# Altium PCB FPGA_Rack_v1_0.PcbDoc (part 4 of 5)
Units mil, origin at the board's own origin, x right, y up, seen from the top; angles counter-clockwise.
Board outline 6299.21 x 3937.01 mil, 8 copper layers (Top Layer, Top, Internal Plane 2, Vcc 3.3V, Internal Plane 1, Gnd, Mid-Layer 1, SIG1, Mid-Layer 2, SIG3, Mid-Layer 3, SIG2, Mid-Layer 4, SIG4, Bottom Layer, Bottom), stack 74.2 mil thick; 215 components, 379 nets, 1713 pads, 1076 vias.
Unrouted connection lines stored in the file: 1.
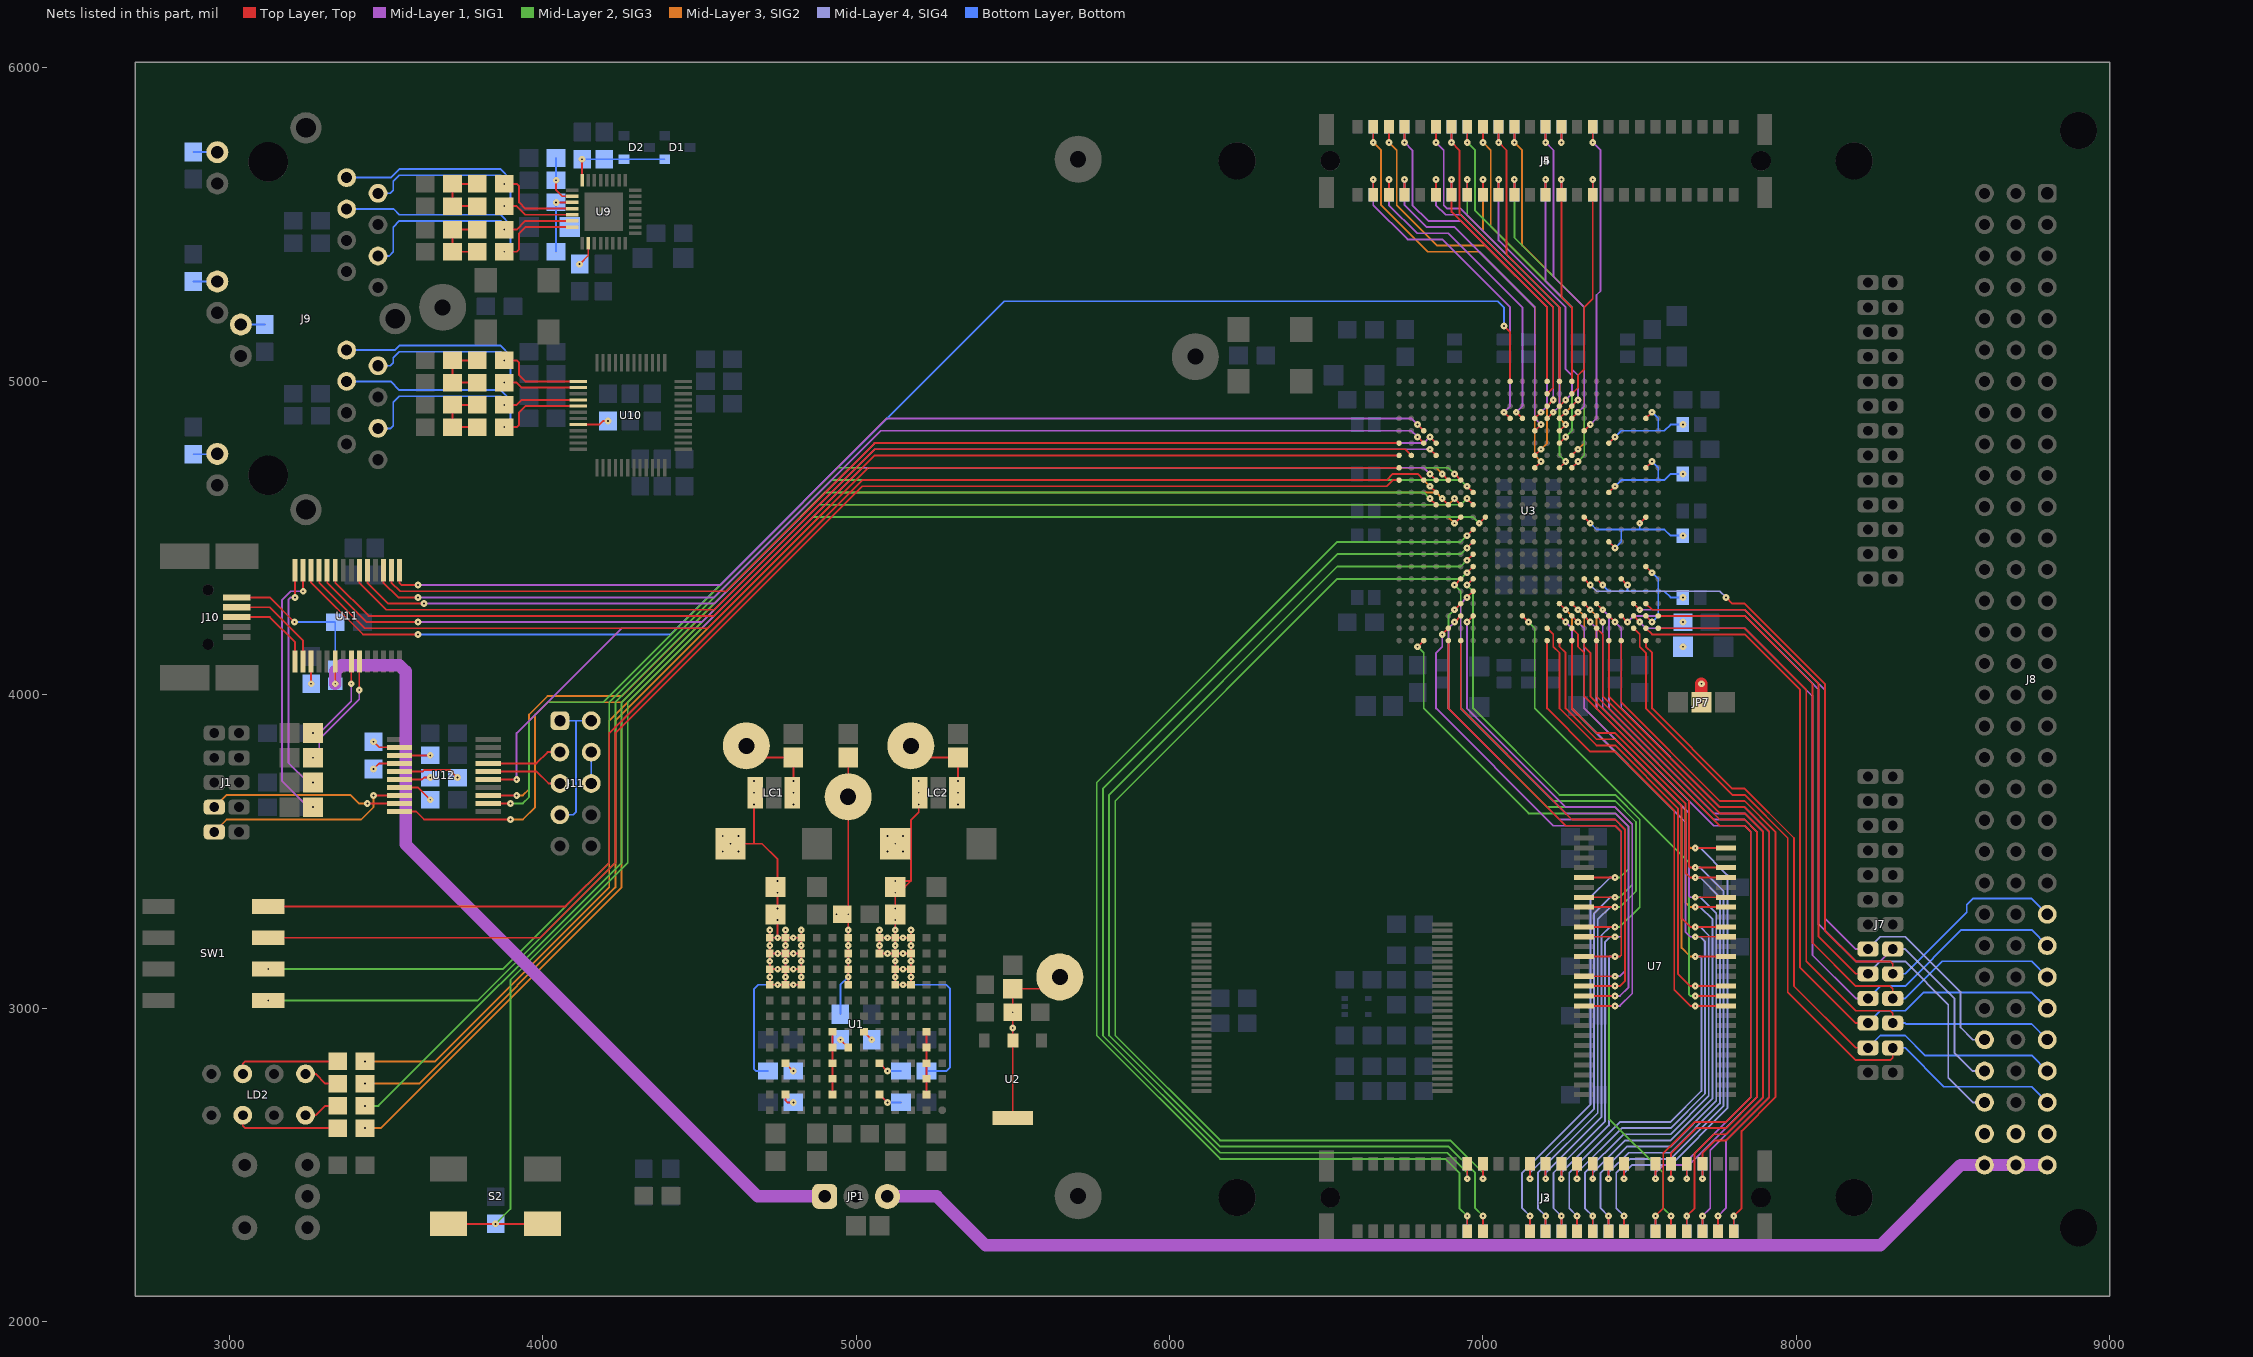
[diagram p10: the nets of this part, all layers, seen from the top]

## Via types
v1: diameter 21.65, hole 5.91, Top Layer, Top to Bottom Layer, Bottom, 1076 vias

## Nets (pads, with @x,y where several pads share a name; then routed paths per layer and width w, separated by ;. In a path a pad name is that pad's centre, name@x,y a point inside that pad or via, vN(x,y) a via of type N, cw(c..) or ccw(c..) an arc to the next point about the centre after c; other vN are vias at no path point) (continued)
MEZ_D02: J2.a12 J3.a12 U3.A20 U7.5 | length 2650.6
  Top Layer, Top w5.91: v1(6791.34,4153.54) U3.A20@6811.02,4173.23 ; J2.a12@7150,2288.23 v1(7150,2337.5) ; U7.5@7322.83,3417.32 v1(7421.26,3417.32)
  Mid-Layer 2, SIG3 w5.91: v1(6791.34,4153.54) 6811.02,4133.86 6811.02,3956.69 7145.67,3622.05 7421.26,3622.05 7464.57,3578.74 7464.57,3444.88 7437.01,3417.32 v1(7421.26,3417.32)
  Mid-Layer 4, SIG4 w5.91: v1(7150,2337.5) 7125,2362.5 7125,2475 7342.52,2692.52 7342.52,3354.33 7405.51,3417.32 v1(7421.26,3417.32)
  Bottom Layer, Bottom w5.91: J3.a12@7150,2288.23 v1(7150,2337.5)
MEZ_D03: J2.b12 J3.b12 U3.D17 U7.7 | length 2570.3
  Top Layer, Top w5.91: v1(6909.45,4271.65) U3.D17@6929.13,4291.34 ; v1(7150,2456.25) J2.b12@7150,2504.77 ; U7.7@7322.83,3354.33 v1(7421.26,3354.33)
  Mid-Layer 2, SIG3 w5.91: v1(6909.45,4271.65) 6889.76,4251.97 6889.76,3956.69 7204.72,3641.73 7421.26,3641.73 7476.38,3586.61 7476.38,3393.7 7437.01,3354.33 v1(7421.26,3354.33)
  Mid-Layer 4, SIG4 w5.91: v1(7150,2456.25) 7150,2475 7354.33,2679.33 7354.33,3303.15 7405.51,3354.33 v1(7421.26,3354.33)
  Bottom Layer, Bottom w5.91: v1(7150,2456.25) J3.b12@7150,2504.77
MEZ_D04: J2.a13 J3.a13 U3.F17 U7.8 | length 2751.3
  Top Layer, Top w5.91: v1(6909.45,4350.39) U3.F17@6929.13,4370.08 ; J2.a13@7200,2288.23 v1(7200,2337.5) ; U7.8@7322.83,3322.83 v1(7421.26,3322.83)
  Mid-Layer 2, SIG3 w5.91: v1(6909.45,4350.39) 6929.13,4330.71 6929.13,3956.69 7224.41,3661.42 7421.26,3661.42 7488.19,3594.49 7488.19,3374.02 7437.01,3322.83 v1(7421.26,3322.83)
  Mid-Layer 4, SIG4 w5.91: v1(7200,2337.5) 7175,2362.5 7175,2475 7366.14,2666.14 7366.14,3283.46 7405.51,3322.83 v1(7421.26,3322.83)
  Bottom Layer, Bottom w5.91: J3.a13@7200,2288.23 v1(7200,2337.5)
MEZ_D05: J2.b13 J3.b13 U3.F16 U7.10 | length 2592.2
  Top Layer, Top w5.91: v1(6948.82,4350.39) U3.F16@6968.5,4370.08 ; v1(7200,2456.25) J2.b13@7200,2504.77 ; U7.10@7322.83,3259.84 v1(7421.26,3259.84)
  Mid-Layer 2, SIG3 w5.91: v1(6948.82,4350.39) 6968.5,4330.71 6968.5,3956.69 7244.09,3681.1 7421.26,3681.1 7500,3602.36 7500,3322.83 7437.01,3259.84 v1(7421.26,3259.84)
  Mid-Layer 4, SIG4 w5.91: v1(7200,2456.25) 7200,2475 7377.95,2652.95 7377.95,3232.28 7405.51,3259.84 v1(7421.26,3259.84)
  Bottom Layer, Bottom w5.91: v1(7200,2456.25) J3.b13@7200,2504.77
MEZ_D06: J2.a14 J3.a14 U3.B18 U7.11 | length 2566.5
  Top Layer, Top w5.91: v1(6870.08,4192.91) U3.B18@6889.76,4212.6 ; J2.a14@7250,2288.23 v1(7250,2337.5) ; U7.11@7322.83,3228.35 v1(7421.26,3228.35)
  Mid-Layer 1, SIG1 w5.91: v1(6870.08,4192.91) 6870.08,4153.54 6850.39,4133.86 6850.39,3956.69 7224.41,3582.68 7421.26,3582.68 7440.94,3562.99 7440.94,3232.28 7437.01,3228.35 v1(7421.26,3228.35)
  Mid-Layer 4, SIG4 w5.91: v1(7250,2337.5) 7225,2362.5 7225,2475 7389.76,2639.76 7389.76,3212.6 7405.51,3228.35 v1(7421.26,3228.35)
  Bottom Layer, Bottom w5.91: J3.a14@7250,2288.23 v1(7250,2337.5)
MEZ_D07: J2.b14 J3.b14 U3.A18 U7.13 | length 2330.5
  Top Layer, Top w5.91: U3.A18@6889.76,4173.23 6889.76,3956.69 7263.78,3582.68 7421.26,3582.68 7440.94,3562.99 7440.94,3169.29 7437.01,3165.35 v1(7421.26,3165.35) U7.13@7322.83,3165.35 ; v1(7250,2456.25) J2.b14@7250,2504.77
  Mid-Layer 4, SIG4 w5.91: v1(7250,2456.25) 7250,2475 7401.57,2626.57 7401.57,3161.42 7405.51,3165.35 v1(7421.26,3165.35)
  Bottom Layer, Bottom w5.91: v1(7250,2456.25) J3.b14@7250,2504.77
MEZ_D08: J2.a15 J3.a15 U3.D9 U7.42 | length 2636
  Top Layer, Top w5.91: U3.D9@7244.09,4291.34 v1(7263.78,4271.65) ; J2.a15@7300,2288.23 v1(7300,2337.5) ; v1(7677.17,3165.35) U7.42@7775.59,3165.35
  Mid-Layer 3, SIG2 w5.91: v1(7263.78,4271.65) 7283.46,4251.97 7283.46,3956.69 7633.86,3606.3 7633.86,3192.91 7661.42,3165.35 v1(7677.17,3165.35)
  Mid-Layer 4, SIG4 w5.91: v1(7300,2337.5) 7275,2362.5 7275,2475 7437.8,2637.8 7598.43,2637.8 7696.85,2736.22 7696.85,3161.42 7692.91,3165.35 v1(7677.17,3165.35)
  Bottom Layer, Bottom w5.91: J3.a15@7300,2288.23 v1(7300,2337.5)
MEZ_D09: J2.b15 J3.b15 U3.C9 U7.44 | length 2462.3
  Top Layer, Top w5.91: U3.C9@7244.09,4251.97 v1(7263.78,4232.28) ; v1(7300,2456.25) J2.b15@7300,2504.77 ; v1(7677.17,3228.35) U7.44@7775.59,3228.35
  Mid-Layer 1, SIG1 w5.91: v1(7263.78,4232.28) 7283.46,4212.6 7283.46,3956.69 7645.67,3594.49 7645.67,3244.09 7661.42,3228.35 v1(7677.17,3228.35)
  Mid-Layer 4, SIG4 w5.91: v1(7300,2456.25) 7300,2475 7443.11,2618.11 7598.43,2618.11 7708.66,2728.35 7708.66,3212.6 7692.91,3228.35 v1(7677.17,3228.35)
  Bottom Layer, Bottom w5.91: v1(7300,2456.25) J3.b15@7300,2504.77
MEZ_D10: J2.a16 J3.a16 U3.A9 U7.45 | length 2545.1
  Top Layer, Top w5.91: U3.A9@7244.09,4173.23 7244.09,4153.54 7263.78,4133.86 7263.78,3956.69 7362.2,3858.27 7421.26,3858.27 7633.86,3645.67 7633.86,3287.4 7661.42,3259.84 v1(7677.17,3259.84) U7.45@7775.59,3259.84 ; J2.a16@7350,2288.23 v1(7350,2337.5)
  Mid-Layer 4, SIG4 w5.91: v1(7350,2337.5) 7325,2362.5 7325,2475 7448.43,2598.43 7598.43,2598.43 7720.47,2720.47 7720.47,3232.28 7692.91,3259.84 v1(7677.17,3259.84)
  Bottom Layer, Bottom w5.91: J3.a16@7350,2288.23 v1(7350,2337.5)
MEZ_D11: J2.b16 J3.b16 U3.D8 U7.47 | length 2478
  Top Layer, Top w5.91: U3.D8@7283.46,4291.34 v1(7303.15,4271.65) ; v1(7350,2456.25) J2.b16@7350,2504.77 ; v1(7677.17,3322.83) U7.47@7775.59,3322.83
  Mid-Layer 3, SIG2 w5.91: v1(7303.15,4271.65) 7322.83,4251.97 7322.83,3956.69 7645.67,3633.86 7645.67,3338.58 7661.42,3322.83 v1(7677.17,3322.83)
  Mid-Layer 4, SIG4 w5.91: v1(7350,2456.25) 7350,2475 7453.74,2578.74 7598.43,2578.74 7732.28,2712.6 7732.28,3283.46 7692.91,3322.83 v1(7677.17,3322.83)
  Bottom Layer, Bottom w5.91: v1(7350,2456.25) J3.b16@7350,2504.77
MEZ_D12: J2.a17 J3.a17 U3.C8 U7.48 | length 2565.6
  Top Layer, Top w5.91: U3.C8@7283.46,4251.97 v1(7303.15,4232.28) ; J2.a17@7400,2288.23 v1(7400,2337.5) ; v1(7677.17,3354.33) U7.48@7775.59,3354.33
  Mid-Layer 1, SIG1 w5.91: v1(7303.15,4232.28) 7322.83,4212.6 7322.83,3956.69 7657.48,3622.05 7657.48,3358.27 7661.42,3354.33 v1(7677.17,3354.33)
  Mid-Layer 4, SIG4 w5.91: v1(7400,2337.5) 7375,2362.5 7375,2475 7459.06,2559.06 7598.43,2559.06 7744.09,2704.72 7744.09,3303.15 7692.91,3354.33 v1(7677.17,3354.33)
  Bottom Layer, Bottom w5.91: J3.a17@7400,2288.23 v1(7400,2337.5)
MEZ_D13: J2.b17 J3.b17 U3.A8 U7.50 | length 2387.1
  Top Layer, Top w5.91: U3.A8@7283.46,4173.23 7283.46,3956.69 7362.2,3877.95 7421.26,3877.95 7645.67,3653.54 7645.67,3433.07 7661.42,3417.32 v1(7677.17,3417.32) U7.50@7775.59,3417.32 ; v1(7400,2456.25) J2.b17@7400,2504.77
  Mid-Layer 4, SIG4 w5.91: v1(7400,2456.25) 7400,2475 7464.37,2539.37 7598.43,2539.37 7755.91,2696.85 7755.91,3354.33 7692.91,3417.32 v1(7677.17,3417.32)
  Bottom Layer, Bottom w5.91: v1(7400,2456.25) J3.b17@7400,2504.77
MEZ_D14: J2.a18 J3.a18 U3.B8 U7.51 | length 2518.8
  Top Layer, Top w5.91: U3.B8@7283.46,4212.6 7303.15,4192.91 7303.15,4153.54 7322.83,4133.86 7322.83,3996.06 7657.48,3661.42 7657.48,3452.76 7661.42,3448.82 v1(7677.17,3448.82) U7.51@7775.59,3448.82 ; J2.a18@7450,2288.23 v1(7450,2337.5)
  Mid-Layer 4, SIG4 w5.91: v1(7450,2337.5) 7425,2362.5 7425,2475 7469.69,2519.68 7598.43,2519.68 7767.72,2688.98 7767.72,3374.02 7692.91,3448.82 v1(7677.17,3448.82)
  Bottom Layer, Bottom w5.91: J3.a18@7450,2288.23 v1(7450,2337.5)
MEZ_D15: J2.b18 J3.b18 U3.D7 U7.53 | length 2447
  Top Layer, Top w5.91: U3.D7@7322.83,4291.34 v1(7342.52,4271.65) ; v1(7450,2456.25) J2.b18@7450,2504.77 ; v1(7677.17,3511.81) U7.53@7775.59,3511.81
  Mid-Layer 3, SIG2 w5.91: v1(7342.52,4271.65) 7362.2,4251.97 7362.2,3956.69 7657.48,3661.42 7657.48,3515.75 7661.42,3511.81 v1(7677.17,3511.81)
  Mid-Layer 4, SIG4 w5.91: v1(7450,2456.25) 7450,2475 7475,2500 7598.43,2500 7779.53,2681.1 7779.53,3425.2 7692.91,3511.81 v1(7677.17,3511.81)
  Bottom Layer, Bottom w5.91: v1(7450,2456.25) J3.b18@7450,2504.77
MEZ_NCS3: J2.a8 J3.a8 U3.K16 | length 3927.4
  Top Layer, Top w5.91: v1(6948.82,4507.87) U3.K16@6968.5,4527.56 ; J2.a8@6950,2288.23 v1(6950,2337.5)
  Mid-Layer 2, SIG3 w5.91: v1(6948.82,4507.87) 6929.13,4488.19 6535.43,4488.19 5767.72,3720.47 5767.72,2913.39 6161.42,2519.68 6880.31,2519.68 6925,2475 6925,2362.5 v1(6950,2337.5)
  Bottom Layer, Bottom w5.91: J3.a8@6950,2288.23 v1(6950,2337.5)
MEZ_NCS4: J2.b8 J3.b8 U3.J16 | length 3754.6
  Top Layer, Top w5.91: v1(6948.82,4468.5) U3.J16@6968.5,4488.19 ; v1(6950,2456.25) J2.b8@6950,2504.77
  Mid-Layer 2, SIG3 w5.91: v1(6948.82,4468.5) 6929.13,4448.82 6535.43,4448.82 5787.4,3700.79 5787.4,2913.39 6161.42,2539.37 6885.63,2539.37 6950,2475 v1(6950,2456.25)
  Bottom Layer, Bottom w5.91: v1(6950,2456.25) J3.b8@6950,2504.77
MEZ_NCS5: J2.a9 J3.a9 U3.H16 | length 3843
  Top Layer, Top w5.91: v1(6948.82,4429.13) U3.H16@6968.5,4448.82 ; J2.a9@7000,2288.23 v1(7000,2337.5)
  Mid-Layer 2, SIG3 w5.91: v1(6948.82,4429.13) 6929.13,4409.45 6535.43,4409.45 5807.09,3681.1 5807.09,2913.39 6161.42,2559.06 6890.94,2559.06 6975,2475 6975,2362.5 v1(7000,2337.5)
  Bottom Layer, Bottom w5.91: J3.a9@7000,2288.23 v1(7000,2337.5)
MEZ_NCS6: J2.b9 J3.b9 U3.G16 | length 3670.2
  Top Layer, Top w5.91: v1(6948.82,4389.76) U3.G16@6968.5,4409.45 ; v1(7000,2456.25) J2.b9@7000,2504.77
  Mid-Layer 2, SIG3 w5.91: v1(6948.82,4389.76) 6929.13,4370.08 6535.43,4370.08 5826.77,3661.42 5826.77,2913.39 6161.42,2578.74 6896.26,2578.74 7000,2475 v1(7000,2456.25)
  Bottom Layer, Bottom w5.91: v1(7000,2456.25) J3.b9@7000,2504.77
MEZ_NOE/NRD0: J2.b20 J3.b20 U3.C7 | length 2333.4
  Top Layer, Top w5.91: U3.C7@7322.83,4251.97 v1(7342.52,4232.28) ; v1(7550,2456.25) J2.b20@7550,2504.77
  Mid-Layer 1, SIG1 w5.91: v1(7342.52,4232.28) 7362.2,4212.6 7362.2,3956.69 7736.22,3582.68 7834.65,3582.68 7854.33,3562.99 7854.33,2716.54 7637.8,2500 7575,2500 7550,2475 v1(7550,2456.25)
  Bottom Layer, Bottom w5.91: v1(7550,2456.25) J3.b20@7550,2504.77
MEZ_NRESET: J2.a25 J3.a25 U3.A4 | length 2239.4
  Top Layer, Top w5.91: U3.A4@7440.94,4173.23 7440.94,3976.38 7755.91,3661.42 7834.65,3661.42 7933.07,3562.99 7933.07,2716.54 7825,2608.46 7825,2362.5 v1(7800,2337.5) J2.a25@7800,2288.23
  Bottom Layer, Bottom w5.91: J3.a25@7800,2288.23 v1(7800,2337.5)
MEZ_NUB/NWR1: J2.b21 J3.b21 U3.A6 | length 2192.8
  Top Layer, Top w5.91: U3.A6@7362.2,4173.23 7362.2,3996.06 7755.91,3602.36 7834.65,3602.36 7874.02,3562.99 7874.02,2716.54 7775.59,2618.11 7680.61,2618.11 7600,2537.5 J2.b21@7600,2504.77 v1(7600,2456.25)
  Bottom Layer, Bottom w5.91: v1(7600,2456.25) J3.b21@7600,2504.77
MEZ_NWAIT: J2.a20 J3.a20 U3.A7 | length 2385.4
  Top Layer, Top w5.91: U3.A7@7322.83,4173.23 7322.83,4153.54 7342.52,4133.86 7342.52,3996.06 7755.91,3582.68 7834.65,3582.68 7854.33,3562.99 7854.33,2716.54 7775.59,2637.8 7675.3,2637.8 7575,2537.5 7575,2362.5 v1(7550,2337.5) J2.a20@7550,2288.23
  Bottom Layer, Bottom w5.91: J3.a20@7550,2288.23 v1(7550,2337.5)
MEZ_NWR/NWR0: J2.a21 J3.a21 U3.A17 U7.16 | length 2452.1
  Top Layer, Top w5.91: U3.A17@6929.13,4173.23 6929.13,3956.69 7283.46,3602.36 7421.26,3602.36 7452.76,3570.87 7452.76,3086.61 7437.01,3070.87 v1(7421.26,3070.87) U7.16@7322.83,3070.87 ; J2.a21@7600,2288.23 v1(7600,2337.5)
  Mid-Layer 2, SIG3 w5.91: v1(7421.26,3070.87) 7405.51,3070.87 7401.57,3066.93 7401.57,2648.43 7575,2475 7575,2362.5 v1(7600,2337.5)
  Bottom Layer, Bottom w5.91: J3.a21@7600,2288.23 v1(7600,2337.5)
MEZ_PA0_MISO: J4.a2 J5.a2 U3.W13 | length 1120.7
  Top Layer, Top w5.91: J4.a2@6650,5595.23 v1(6650,5643.75) ; v1(7066.93,4901.57) U3.W13@7086.61,4881.89
  Mid-Layer 1, SIG1 w5.91: v1(6650,5643.75) 6650,5562.5 6759.74,5452.76 6870.08,5452.76 7086.61,5236.22 7086.61,4921.26 v1(7066.93,4901.57)
  Bottom Layer, Bottom w5.91: J5.a2@6650,5595.23 v1(6650,5643.75)
MEZ_PA1_MOSI: J4.b2 J5.b2 U3.R11 | length 1462.5
  Top Layer, Top w5.91: v1(6650,5762.5) J4.b2@6650,5811.77 ; U3.R11@7165.35,4724.41 v1(7185.04,4744.09)
  Mid-Layer 3, SIG2 w5.91: v1(6650,5762.5) 6675,5737.5 6675,5562.5 6824.11,5413.39 6988.19,5413.39 7165.35,5236.22 7165.35,4763.78 v1(7185.04,4744.09)
  Bottom Layer, Bottom w5.91: v1(6650,5762.5) J5.b2@6650,5811.77
MEZ_PA2_SPCK: J4.a3 J5.a3 U3.W12 | length 1110.1
  Top Layer, Top w5.91: J4.a3@6700,5595.23 v1(6700,5643.75) ; v1(7106.3,4901.57) U3.W12@7125.98,4881.89
  Mid-Layer 1, SIG1 w5.91: v1(6700,5643.75) 6700,5562.5 6790.06,5472.44 6889.76,5472.44 7125.98,5236.22 7125.98,4921.26 v1(7106.3,4901.57)
  Bottom Layer, Bottom w5.91: J5.a3@6700,5595.23 v1(6700,5643.75)
MEZ_PA5_NPCS2: J4.b3 J5.b3 U3.T11 | length 1412.5
  Top Layer, Top w5.91: v1(6700,5762.5) J4.b3@6700,5811.77 ; U3.T11@7165.35,4763.78 v1(7185.04,4783.46)
  Mid-Layer 3, SIG2 w5.91: v1(6700,5762.5) 6725,5737.5 6725,5562.5 6854.43,5433.07 7007.87,5433.07 7204.72,5236.22 7204.72,4803.15 v1(7185.04,4783.46)
  Bottom Layer, Bottom w5.91: v1(6700,5762.5) J5.b3@6700,5811.77
MEZ_PA6_NPCS3: J4.a4 J5.a4 U3.V11 | length 1138.8
  Top Layer, Top w5.91: J4.a4@6750,5595.23 v1(6750,5643.75) ; U3.V11@7165.35,4842.52 v1(7185.04,4862.2)
  Mid-Layer 1, SIG1 w5.91: v1(6750,5643.75) 6750,5562.5 6820.37,5492.13 6909.45,5492.13 7165.35,5236.22 7165.35,4881.89 v1(7185.04,4862.2)
  Bottom Layer, Bottom w5.91: J5.a4@6750,5595.23 v1(6750,5643.75)
MEZ_PA09/IRQ0: J2.a22 J3.a22 U3.B6 | length 2364.1
  Top Layer, Top w5.91: U3.B6@7362.2,4212.6 7381.89,4192.91 7381.89,3996.06 7755.91,3622.05 7834.65,3622.05 7893.7,3562.99 7893.7,2716.54 7775.59,2598.43 7735.93,2598.43 7675,2537.5 7675,2362.5 v1(7650,2337.5) J2.a22@7650,2288.23
  Bottom Layer, Bottom w5.91: J3.a22@7650,2288.23 v1(7650,2337.5)
MEZ_PA10/IRQ1: J2.b22 J3.b22 U3.C6 | length 2255.2
  Top Layer, Top w5.91: U3.C6@7362.2,4251.97 v1(7381.89,4232.28) ; v1(7650,2456.25) J2.b22@7650,2504.77
  Mid-Layer 1, SIG1 w5.91: v1(7381.89,4232.28) 7381.89,3956.69 7736.22,3602.36 7834.65,3602.36 7874.02,3562.99 7874.02,2716.54 7650,2492.52 v1(7650,2456.25)
  Bottom Layer, Bottom w5.91: v1(7650,2456.25) J3.b22@7650,2504.77
MEZ_PA11/IRQ2: J2.a23 J3.a23 U3.D6 | length 2410.4
  Top Layer, Top w5.91: U3.D6@7362.2,4291.34 v1(7381.89,4271.65) ; J2.a23@7700,2288.23 v1(7700,2337.5)
  Mid-Layer 1, SIG1 w5.91: v1(7381.89,4271.65) 7401.57,4251.97 7401.57,3956.69 7736.22,3622.05 7834.65,3622.05 7893.7,3562.99 7893.7,2716.54 7725,2547.83 7725,2362.5 v1(7700,2337.5)
  Bottom Layer, Bottom w5.91: J3.a23@7700,2288.23 v1(7700,2337.5)
MEZ_PA12/IRQ3: J2.b23 J3.b23 U3.A5 | length 2132.1
  Top Layer, Top w5.91: U3.A5@7401.57,4173.23 7401.57,3996.06 7755.91,3641.73 7834.65,3641.73 7913.39,3562.99 7913.39,2716.54 7775.59,2578.74 7741.24,2578.74 7700,2537.5 J2.b23@7700,2504.77 v1(7700,2456.25)
  Bottom Layer, Bottom w5.91: v1(7700,2456.25) J3.b23@7700,2504.77
MEZ_PA13/FIQ: J2.a24 J3.a24 U3.C5 | length 2338.8
  Top Layer, Top w5.91: U3.C5@7401.57,4251.97 v1(7421.26,4232.28) ; J2.a24@7750,2288.23 v1(7750,2337.5)
  Mid-Layer 1, SIG1 w5.91: v1(7421.26,4232.28) 7440.94,4212.6 7440.94,3956.69 7755.91,3641.73 7834.65,3641.73 7913.39,3562.99 7913.39,2716.54 7775,2578.15 7775,2362.5 v1(7750,2337.5)
  Bottom Layer, Bottom w5.91: J3.a24@7750,2288.23 v1(7750,2337.5)
MEZ_PB1: J4.b13 J5.b13 U3.W8 | length 1046.3
  Top Layer, Top w5.91: v1(7200,5762.5) J4.b13@7200,5811.77 ; U3.W8@7283.46,4881.89 v1(7303.15,4901.57)
  Mid-Layer 1, SIG1 w5.91: v1(7200,5762.5) 7225,5737.5 7225,5334.06 7322.83,5236.22 7322.83,4921.26 v1(7303.15,4901.57)
  Bottom Layer, Bottom w5.91: v1(7200,5762.5) J5.b13@7200,5811.77
MEZ_PB2: J4.a14 J5.a14 U3.AB8 | length 706.1
  Top Layer, Top w5.91: v1(7250,5643.75) J4.a14@7250,5595.23 7250,5269.69 7283.46,5236.22 U3.AB8@7283.46,5000
  Bottom Layer, Bottom w5.91: J5.a14@7250,5595.23 v1(7250,5643.75)
MEZ_PB6: J4.a6 J5.a6 U3.Y10 | length 1011
  Top Layer, Top w5.91: J4.a6@6850,5595.23 v1(6850,5643.75) ; U3.Y10@7204.72,4921.26 v1(7224.41,4940.94)
  Mid-Layer 1, SIG1 w5.91: v1(6850,5643.75) 6850,5562.5 6881,5531.5 6929.13,5531.5 7224.41,5236.22 v1(7224.41,4940.94)
  Bottom Layer, Bottom w5.91: J5.a6@6850,5595.23 v1(6850,5643.75)
MEZ_PB7: J4.b6 J5.b6 U3.W10 | length 1183.8
  Top Layer, Top w5.91: v1(6850,5762.5) J4.b6@6850,5811.77 ; U3.W10@7204.72,4881.89 v1(7224.41,4901.57)
  Mid-Layer 1, SIG1 w5.91: v1(6850,5762.5) 6875,5737.5 6875,5562.5 6886.32,5551.18 6929.13,5551.18 7244.09,5236.22 7244.09,4921.26 v1(7224.41,4901.57)
  Bottom Layer, Bottom w5.91: v1(6850,5762.5) J5.b6@6850,5811.77
MEZ_PB8: J4.a7 J5.a7 U3.AB10 | length 818.5
  Top Layer, Top w5.91: v1(6900,5643.75) J4.a7@6900,5595.23 6900,5540.94 7204.72,5236.22 U3.AB10@7204.72,5000
  Bottom Layer, Bottom w5.91: J5.a7@6900,5595.23 v1(6900,5643.75)
MEZ_PB9: J4.b7 J5.b7 U3.AA10 | length 1042.9
  Top Layer, Top w5.91: J4.b7@6900,5811.77 v1(6900,5762.5) 6925,5737.5 6925,5535.63 7224.41,5236.22 7224.41,4980.31 U3.AA10@7204.72,4960.63
  Bottom Layer, Bottom w5.91: v1(6900,5762.5) J5.b7@6900,5811.77
MEZ_PB10: J4.b8 J5.b8 U3.U9 | length 1212.3
  Top Layer, Top w5.91: v1(6950,5762.5) J4.b8@6950,5811.77 ; U3.U9@7244.09,4803.15 v1(7263.78,4822.83)
  Mid-Layer 2, SIG3 w5.91: v1(6950,5762.5) 6975,5737.5 6975,5544.69 7283.46,5236.22 7283.46,4842.52 v1(7263.78,4822.83)
  Bottom Layer, Bottom w5.91: v1(6950,5762.5) J5.b8@6950,5811.77
MEZ_PB11: J4.a8 J5.a8 U3.R9 | length 1154.5
  Top Layer, Top w5.91: J4.a8@6950,5595.23 v1(6950,5643.75) ; U3.R9@7244.09,4724.41 v1(7263.78,4744.09)
  Mid-Layer 2, SIG3 w5.91: v1(6950,5643.75) 6950,5530.31 7244.09,5236.22 7244.09,4763.78 v1(7263.78,4744.09)
  Bottom Layer, Bottom w5.91: J5.a8@6950,5595.23 v1(6950,5643.75)
MEZ_PB14: J4.a9 J5.a9 U3.V9 | length 1015.7
  Top Layer, Top w5.91: J4.a9@7000,5595.23 v1(7000,5643.75) ; U3.V9@7244.09,4842.52 v1(7263.78,4862.2)
  Mid-Layer 3, SIG2 w5.91: v1(7000,5643.75) 7000,5480.31 7244.09,5236.22 7244.09,4881.89 v1(7263.78,4862.2)
  Bottom Layer, Bottom w5.91: J5.a9@7000,5595.23 v1(7000,5643.75)
MEZ_PB15: J4.b9 J5.b9 U3.W9 | length 1112.9
  Top Layer, Top w5.91: v1(7000,5762.5) J4.b9@7000,5811.77 ; U3.W9@7244.09,4881.89 v1(7263.78,4901.57)
  Mid-Layer 3, SIG2 w5.91: v1(7000,5762.5) 7025,5737.5 7025,5494.69 7283.46,5236.22 7283.46,4921.26 v1(7263.78,4901.57)
  Bottom Layer, Bottom w5.91: v1(7000,5762.5) J5.b9@7000,5811.77
MEZ_PB16: J4.a10 J5.a10 U3.Y9 | length 932.5
  Top Layer, Top w5.91: J4.a10@7050,5595.23 v1(7050,5643.75) ; U3.Y9@7244.09,4921.26 v1(7263.78,4940.94)
  Mid-Layer 1, SIG1 w5.91: v1(7050,5643.75) 7050,5450 7263.78,5236.22 7263.78,5039.37 7283.46,5019.69 7283.46,4960.63 v1(7263.78,4940.94)
  Bottom Layer, Bottom w5.91: J5.a10@7050,5595.23 v1(7050,5643.75)
MEZ_PB17: J4.b10 J5.b10 U3.AB9 | length 941.4
  Top Layer, Top w5.91: J4.b10@7050,5811.77 v1(7050,5762.5) 7075,5737.5 7075,5405.31 7244.09,5236.22 U3.AB9@7244.09,5000
  Bottom Layer, Bottom w5.91: v1(7050,5762.5) J5.b10@7050,5811.77
MEZ_PB18: J4.a11 J5.a11 U3.R8 | length 1125
  Top Layer, Top w5.91: J4.a11@7100,5595.23 v1(7100,5643.75) ; U3.R8@7283.46,4724.41 v1(7303.15,4744.09)
  Mid-Layer 2, SIG3 w5.91: v1(7100,5643.75) 7100,5459.06 7322.83,5236.22 7322.83,4763.78 v1(7303.15,4744.09)
  Bottom Layer, Bottom w5.91: J5.a11@7100,5595.23 v1(7100,5643.75)
MEZ_PB19: J4.b11 J5.b11 U3.T8 | length 1205.9
  Top Layer, Top w5.91: v1(7100,5762.5) J4.b11@7100,5811.77 ; U3.T8@7283.46,4763.78 v1(7303.15,4783.46)
  Mid-Layer 3, SIG2 w5.91: v1(7100,5762.5) 7125,5737.5 7125,5434.06 7322.83,5236.22 7322.83,4803.15 v1(7303.15,4783.46)
  Bottom Layer, Bottom w5.91: v1(7100,5762.5) J5.b11@7100,5811.77
MEZ_PB22: J4.a13 J5.a13 U3.Y8 | length 870.4
  Top Layer, Top w5.91: J4.a13@7200,5595.23 v1(7200,5643.75) ; U3.Y8@7283.46,4921.26 v1(7303.15,4940.94)
  Mid-Layer 1, SIG1 w5.91: v1(7200,5643.75) 7200,5319.69 7283.46,5236.22 7283.46,5039.37 7303.15,5019.69 v1(7303.15,4940.94)
  Bottom Layer, Bottom w5.91: J5.a13@7200,5595.23 v1(7200,5643.75)
MEZ_PD13: J4.b4 J5.b4 U3.W11 | length 1244.4
  Top Layer, Top w5.91: v1(6750,5762.5) J4.b4@6750,5811.77 ; U3.W11@7165.35,4881.89 v1(7185.04,4901.57)
  Mid-Layer 1, SIG1 w5.91: v1(6750,5762.5) 6775,5737.5 6775,5562.5 6825.69,5511.81 6929.13,5511.81 7204.72,5236.22 7204.72,4921.26 v1(7185.04,4901.57)
  Bottom Layer, Bottom w5.91: v1(6750,5762.5) J5.b4@6750,5811.77
MEZ_PD20: J4.a16 J5.a16 U3.AA8 | length 759.2
  Top Layer, Top w5.91: U3.AA8@7283.46,4960.63 7303.15,4980.31 7303.15,5019.69 7322.83,5039.37 7322.83,5236.22 7350,5263.39 J4.a16@7350,5595.23 v1(7350,5643.75)
  Bottom Layer, Bottom w5.91: J5.a16@7350,5595.23 v1(7350,5643.75)
MEZ_PD21: J4.b16 J5.b16 U3.V7 | length 1050.5
  Top Layer, Top w5.91: U3.V7@7322.83,4842.52 v1(7342.52,4862.2) ; v1(7350,5762.5) J4.b16@7350,5811.77
  Mid-Layer 1, SIG1 w5.91: v1(7342.52,4862.2) 7362.2,4881.89 7362.2,5275.59 7375,5288.39 7375,5737.5 v1(7350,5762.5)
  Bottom Layer, Bottom w5.91: v1(7350,5762.5) J5.b16@7350,5811.77
NC: J4.b14 J5.b14 | length 98.5
  Top Layer, Top w5.91: v1(7250,5762.5) J4.b14@7250,5811.77
  Bottom Layer, Bottom w5.91: v1(7250,5762.5) J5.b14@7250,5811.77
NET00000: LD2.1 R16.2 | length 115.6
  Top Layer, Top w5.91: LD2.1@3243.75,2791 3275.93,2791 3307.09,2759.84 R16.2@3346.46,2759.84
NET00001: LD2.3 R17.2 | length 338.1
  Top Layer, Top w5.91: LD2.3@3043.75,2791 3043.75,2823.28 3051.18,2830.71 R17.2@3346.46,2830.71
NET00002: R39.2 U9.10 | length 78.3
  Top Layer, Top w5.91: v1(4118.11,5374.02) 4145.67,5401.57 U9.10@4145.67,5440.94
NET00003: C10.2 JP3.1 PT2.1 R2.1 U1.81 U1.82 U1.83 U1.84 | length 891.6
  Top Layer, Top w5.91: v1(4937.5,3300) C10.2@4956.25,3300 v1(4975,3300) ; U1.81@4975,3075 v1(4975,3100) U1.82@4975,3125 v1(4975,3150) U1.83@4975,3175 v1(4975,3200) U1.84@4975,3225 v1(4975,3250) v1(4975,3300) ; JP3.1@4975,3800 PT2.1@4975,3675 v1(4975,3300)
  Bottom Layer, Bottom w5.91: R2.1@4950,2981.25 4950,3075 v1(4975,3100)
NET00004: C11.2 C13.2 C15.PLUS LC1.1 R3.1 U1.117 U1.118 U1.119 U1.120 U1.129 U1.130 U1.131 U1.132 U1.141 U1.142 U1.143 U1.144 | length 2085.4
  Top Layer, Top w5.91: v1(4575,3500) v1(4600,3525) ; v1(4575,3550) v1(4600,3525) ; v1(4625,3500) v1(4600,3525) ; v1(4625,3550) v1(4600,3525) ; v1(4675,3725) v1(4675,3687.5) ; LC1.1@4678.05,3687.5 v1(4675,3687.5) ; v1(4725,3250) U1.144@4725,3225 ; C11.2@4743.75,3300 C11.2@4750,3300 ; C13.2@4743.75,3387.5 C13.2@4750,3387.5 ; v1(4775,3250) U1.132@4775,3225 ; v1(4825,3250) U1.120@4825,3225 ; v1(4600,3525) 4675,3525 ; 4675,3525 v1(4675,3650) v1(4675,3687.5) ; 4675,3525 4700,3525 4750,3475 v1(4750,3406.25) C13.2@4750,3387.5 ; U1.142@4725,3125 v1(4750,3125) U1.130@4775,3125 ; U1.142@4725,3125 v1(4725,3150) U1.143@4725,3175 ; U1.142@4725,3125 v1(4725,3100) U1.141@4725,3075 v1(4750,3075) U1.129@4775,3075 ; U1.143@4725,3175 v1(4750,3175) U1.131@4775,3175 ; U1.143@4725,3175 v1(4725,3200) U1.144@4725,3225 ; U1.144@4725,3225 v1(4750,3225) ; v1(4750,3225) U1.132@4775,3225 ; v1(4750,3225) v1(4750,3281.25) C11.2@4750,3300 ; C11.2@4750,3300 v1(4750,3318.75) v1(4750,3368.75) C13.2@4750,3387.5 ; U1.129@4775,3075 v1(4800,3075) U1.117@4825,3075 v1(4825,3100) U1.118@4825,3125 ; U1.129@4775,3075 v1(4775,3100) U1.130@4775,3125 ; U1.130@4775,3125 v1(4800,3125) U1.118@4825,3125 ; U1.130@4775,3125 v1(4775,3150) U1.131@4775,3175 ; U1.131@4775,3175 v1(4800,3175) U1.119@4825,3175 ; U1.131@4775,3175 v1(4775,3200) U1.132@4775,3225 ; U1.132@4775,3225 v1(4800,3225) U1.120@4825,3225 ; U1.118@4825,3125 v1(4825,3150) U1.119@4825,3175 ; U1.119@4825,3175 v1(4825,3200) U1.120@4825,3225
  Bottom Layer, Bottom w5.91: R3.1@4718.75,2800 4681.25,2800 4675,2806.25 4675,3062.5 4687.5,3075 v1(4750,3075)
NET00005: C12.2 C14.2 C16.PLUS LC2.1 R4.1 U1.33 U1.34 U1.35 U1.36 U1.45 U1.46 U1.47 U1.48 U1.59 U1.60 | length 1979.2
  Top Layer, Top w5.91: v1(5075,3250) U1.60@5075,3225 ; v1(5100,3500) v1(5125,3525) ; v1(5100,3550) v1(5125,3525) ; v1(5125,3406.25) 5175,3406.25 ; v1(5150,3500) v1(5125,3525) ; v1(5150,3550) v1(5125,3525) ; v1(5175,3250) U1.36@5175,3225 ; v1(5200,3725) v1(5200,3687.5) ; LC2.1@5203.05,3687.5 v1(5200,3687.5) ; U1.60@5075,3225 v1(5100,3225) U1.48@5125,3225 ; U1.60@5075,3225 v1(5075,3200) U1.59@5075,3175 v1(5100,3175) U1.47@5125,3175 ; U1.46@5125,3125 v1(5150,3125) U1.34@5175,3125 ; U1.46@5125,3125 v1(5125,3150) U1.47@5125,3175 ; U1.46@5125,3125 v1(5125,3100) U1.45@5125,3075 v1(5150,3075) U1.33@5175,3075 v1(5175,3100) U1.34@5175,3125 ; U1.47@5125,3175 v1(5150,3175) U1.35@5175,3175 ; U1.47@5125,3175 v1(5125,3200) U1.48@5125,3225 ; U1.48@5125,3225 v1(5125,3250) v1(5125,3281.25) C12.2@5125,3300 v1(5125,3318.75) v1(5125,3368.75) C14.2@5125,3387.5 5156.25,3387.5 5175,3406.25 ; U1.48@5125,3225 v1(5150,3225) U1.36@5175,3225 ; v1(5125,3525) 5175,3525 ; U1.34@5175,3125 v1(5175,3150) U1.35@5175,3175 ; U1.35@5175,3175 v1(5175,3200) U1.36@5175,3225 ; 5175,3406.25 5175,3525 ; 5175,3525 5175,3600 5200,3625 v1(5200,3650) v1(5200,3687.5)
  Bottom Layer, Bottom w5.91: v1(5150,3075) 5287.5,3075 5300,3062.5 5300,2812.5 5287.5,2800 R4.1@5225,2800
NET00006: LD2.5 R18.2 | length 115.1
  Top Layer, Top w5.91: LD2.5@3243.75,2659 3277.11,2659 3307.09,2688.98 R18.2@3346.46,2688.98
NET00007: LD2.7 R19.2 | length 339.2
  Top Layer, Top w5.91: LD2.7@3043.75,2659 3043.75,2625.54 3051.18,2618.11 R19.2@3346.46,2618.11
NET00008: J9.9 R29.1 | length 77.1
  Bottom Layer, Bottom w5.91: R29.1@2885.83,5732.28 2961.47,5732.28 J9.9@2962.5,5731.25
NET00009: R1.2 U1.66 | length 35.4
  Top Layer, Top w5.91: U1.66@5025,2925 v1(5050,2900)
NET00010: J9.11 R30.1 | length 76.7
  Bottom Layer, Bottom w5.91: R30.1@2885.83,5318.9 2962.35,5318.9 J9.11@2962.5,5318.75
NET00012: C85.1 R35.2 R36.2 R38.1 | length 228.3
  Top Layer, Top w5.91: R35.2@3791.34,5413.39 C85.1@3712.6,5413.39 R38.1@3712.6,5484.25 R36.2@3791.34,5484.25
NET00013: C7.2 JP6.1 PT5.1 U2.1 U2.4 | length 578
  Top Layer, Top w5.91: U2.1@5500,2650 U2.4@5500,2898 v1(5500,2937.5) v1(5500,2987.5) JP6.1@5500,3062.5 5612.5,3062.5 PT5.1@5650,3100
NET00016: C74.2 C75.2 U9.2 | length 161.7
  Top Layer, Top w5.91: v1(4043.31,5641.73) 4043.31,5610.24 4062.99,5590.55 U9.2@4094.49,5590.55
  Bottom Layer, Bottom w5.91: v1(4043.31,5641.73) C75.2@4043.31,5712.6
NET00017: R48.2 U10.20 | length 99.4
  Top Layer, Top w5.91: U10.20@4114.17,4862.2 4181.1,4862.2 4192.91,4874.02 v1(4208.66,4874.02)
NET00020: C84.1 R33.2 R34.2 R37.1 | length 228.3
  Top Layer, Top w5.91: R33.2@3791.34,5559.06 R37.1@3712.6,5559.06 C84.1@3712.6,5629.92 R34.2@3791.34,5629.92
NET00021: J9.21 R40.1 | length 76.7
  Bottom Layer, Bottom w5.91: J9.21@3037.5,5181.25 3037.65,5181.1 R40.1@3114.17,5181.1
NET00022: J9.23 R41.1 | length 77.1
  Bottom Layer, Bottom w5.91: R41.1@2885.83,4767.72 2961.47,4767.72 J9.23@2962.5,4768.75
NET00025: C105.1 U12.3 | length 98.4
  Top Layer, Top w5.91: U12.3@3543.31,3807.09 v1(3641.73,3807.09)
NET00026: C106.1 U12.7 | length 114.7
  Top Layer, Top w5.91: U12.7@3543.31,3704.72 3602.36,3704.72 v1(3641.73,3665.35)
NET00027: C104.2 U12.5 | length 196.5
  Top Layer, Top w5.91: U12.5@3543.31,3755.91 3618.11,3755.91 3622.05,3759.84 3704.72,3759.84 v1(3728.35,3736.22)
NET00028: C104.1 U12.6 | length 100.9
  Top Layer, Top w5.91: U12.6@3543.31,3730.31 3616.14,3730.32 3622.05,3736.22 v1(3641.73,3736.22)
NET00029: C103.1 U12.4 | length 90
  Top Layer, Top w5.91: v1(3460.63,3763.78) 3478.35,3781.5 U12.4@3543.31,3781.5
NET00030: C103.2 U12.2 | length 90
  Top Layer, Top w5.91: v1(3460.63,3850.39) 3478.35,3832.68 U12.2@3543.31,3832.68
NET00031: C95.1 R44.2 R45.2 R47.1 | length 228.3
  Top Layer, Top w5.91: R44.2@3791.34,4854.33 C95.1@3712.6,4854.33 R47.1@3712.6,4925.2 R45.2@3791.34,4925.2
NET00032: C94.1 R42.2 R43.2 R46.1 | length 228.3
  Top Layer, Top w5.91: R42.2@3791.34,4996.06 R46.1@3712.6,4996.06 C94.1@3712.6,5066.93 R43.2@3791.34,5066.93
NET00035: C102.2 U11.17 | length 82.7
  Top Layer, Top w5.91: v1(3261.81,4035.43) U11.17@3261.81,4106.3 U11.17@3261.81,4118.11
NET00038: C78.2 C80.2 L1.1 U9.3 | length 252
  Top Layer, Top w5.91: v1(4043.31,5570.87) U9.3@4094.49,5570.87
  Bottom Layer, Bottom w5.91: L1.1@4043.31,5413.39 4043.31,5492.13 ; v1(4043.31,5570.87) 4043.31,5492.13 ; C80.2@4086.61,5492.13 4043.31,5492.13
NET00055: J11.1 J11.2 J11.7 | length 446.1
  Bottom Layer, Bottom w5.91: J11.7@4055.12,3617.32 4097.64,3617.32 4106.3,3625.98 4106.3,3917.32 ; J11.1@4055.12,3917.32 4106.3,3917.32 ; J11.2@4155.12,3917.32 4106.3,3917.32
NET00058: J11.4 J11.6 | length 100
  Bottom Layer, Bottom w5.91: J11.6@4155.12,3717.32 J11.4@4155.12,3817.32
NET00061: C79.2 D1.1 D2.1 R31.1 U9.32 | length 330.7
  Top Layer, Top w5.91: U9.32@4125.98,5641.73 v1(4125.98,5708.66)
  Bottom Layer, Bottom w5.91: v1(4125.98,5708.66) R31.1@4196.85,5708.66 D2.1@4259.84,5708.66 D1.1@4389.76,5708.66
NET00071: JP4.1 LC1.3 PT3.1 | length 318.6
  Top Layer, Top w5.91: PT3.1@4650,3837.5 4687.5,3800 JP4.1@4800,3800 v1(4800,3725) v1(4800,3687.5) ; LC1.3@4796.95,3687.5 v1(4800,3687.5) ; v1(4800,3650) v1(4800,3687.5)
NET00072: JP5.1 LC2.3 PT4.1 | length 318.6
  Top Layer, Top w5.91: PT4.1@5175,3837.5 5212.5,3800 JP5.1@5325,3800 v1(5325,3725) v1(5325,3687.5) ; LC2.3@5321.95,3687.5 v1(5325,3687.5) ; v1(5325,3650) v1(5325,3687.5)
PGOOD_1.2V: R4.2 U1.52 | length 79.1
  Top Layer, Top w5.91: U1.52@5075,2825 v1(5100,2800)
  Bottom Layer, Bottom w5.91: v1(5100,2800) R4.2@5143.75,2800
PGOOD_1.8V: R2.2 U1.77 | length 35.4
  Top Layer, Top w5.91: v1(4950,2900) U1.77@4975,2875
PGOOD_3.3V: R3.2 U1.124 | length 35.4
  Top Layer, Top w5.91: U1.124@4775,2825 v1(4800,2800)
RS_RXD0: J11.5 U12.16 | length 244.3
  Top Layer, Top w5.91: U12.16@3826.77,3755.91 3980.32,3755.91 4018.9,3717.32 J11.5@4055.12,3717.32
RS_RXD1: J1.4 U12.9 | length 618.3
  Top Layer, Top w5.91: v1(3440.94,3653.54) U12.9@3543.31,3653.54
  Mid-Layer 3, SIG2 w5.91: J1.4@2952.76,3641.73 2992.13,3681.1 3385.83,3681.1 3413.39,3653.54 v1(3440.94,3653.54)
RS_TXD0: J11.3 U12.17 | length 243.2
  Top Layer, Top w5.91: U12.17@3826.77,3781.5 3980.32,3781.5 4016.14,3817.32 J11.3@4055.12,3817.32
RS_TXD1: J1.2 U12.8 | length 660.6
  Top Layer, Top w5.91: v1(3460.63,3679.13) U12.8@3543.31,3679.13
  Mid-Layer 3, SIG2 w5.91: J1.2@2952.76,3562.99 2992.13,3602.36 3421.26,3602.36 3460.63,3641.73 v1(3460.63,3679.13)
RX0+: J9.1 R33.1 U9.5 | length 878.9
  Top Layer, Top w5.91: v1(3877.95,5559.06) 3917.32,5559.06 3944.88,5531.5 U9.5@4094.49,5531.5
  Bottom Layer, Bottom w5.91: J9.1@3375,5650 3516.14,5650 3543.31,5677.17 3866.14,5677.17 3897.64,5645.67 3897.64,5562.99 3893.7,5559.06 v1(3877.95,5559.06)
RX0-: J9.2 R34.1 U9.4 | length 742.7
  Top Layer, Top w5.91: v1(3877.95,5629.92) 3917.32,5629.92 3925.2,5622.05 3925.2,5570.87 3944.88,5551.18 U9.4@4094.49,5551.18
  Bottom Layer, Bottom w5.91: J9.2@3475,5600 3513.39,5600 3523.62,5610.24 3523.62,5637.8 3543.31,5657.48 3866.14,5657.48 3877.95,5645.67 v1(3877.95,5629.92)
RX1+: J9.13 R42.1 U10.14 | length 888.3
  Top Layer, Top w5.91: v1(3877.95,4996.06) 3917.32,4996.06 3933.07,4980.31 U10.14@4114.17,4980.31
  Bottom Layer, Bottom w5.91: J9.13@3375,5100 3529.13,5100 3543.31,5114.17 3866.14,5114.17 3897.64,5082.68 3897.64,5000 3893.7,4996.06 v1(3877.95,4996.06)
RX1-: J9.14 R43.1 U10.13 | length 738.3
  Top Layer, Top w5.91: v1(3877.95,5066.93) 3917.32,5066.93 3925.2,5059.06 3925.2,5019.69 3944.88,5000 U10.13@4114.17,5000
  Bottom Layer, Bottom w5.91: J9.14@3475,5050 3514.57,5050 3523.62,5059.06 3523.62,5074.8 3543.31,5094.49 3866.14,5094.49 3877.95,5082.68 v1(3877.95,5066.93)
SD_CKE: U3.A10 U7.37 | length 1514.8
  Top Layer, Top w5.91: U3.A10@7204.72,4173.23 7204.72,3956.69 7342.52,3818.9 7421.26,3818.9 7610.24,3629.92 7610.24,3059.06 7661.42,3007.87 v1(7677.17,3007.87) U7.37@7775.59,3007.87
SD_CLK: U3.C12 U7.38 | length 1548.6
  Top Layer, Top w5.91: U3.C12@7125.98,4251.97 v1(7145.67,4232.28) ; v1(7677.17,3039.37) U7.38@7775.59,3039.37
  Mid-Layer 2, SIG3 w5.91: v1(7145.67,4232.28) 7165.35,4212.6 7165.35,3956.69 7657.48,3464.57 7657.48,3043.31 7661.42,3039.37 v1(7677.17,3039.37)
SD_DQMH: U3.B10 U7.39 | length 1479.7
  Top Layer, Top w5.91: U3.B10@7204.72,4212.6 7224.41,4192.91 7224.41,4153.54 7244.09,4133.86 7244.09,3956.69 7362.2,3838.58 7421.26,3838.58 7622.05,3637.8 7622.05,3110.24 7661.42,3070.87 v1(7677.17,3070.87) U7.39@7775.59,3070.87
SD_DQML: U3.C17 U7.15 | length 1623.6
  Top Layer, Top w5.91: v1(6909.45,4232.28) U3.C17@6929.13,4251.97 ; U7.15@7322.83,3102.36 v1(7421.26,3102.36)
  Mid-Layer 1, SIG1 w5.91: v1(6909.45,4232.28) 6889.76,4212.6 6889.76,3956.69 7244.09,3602.36 7421.26,3602.36 7452.76,3570.87 7452.76,3118.11 7437.01,3102.36 v1(7421.26,3102.36)
SD_NCAS: U3.E16 U7.17 | length 1747.3
  Top Layer, Top w5.91: v1(6948.82,4311.02) U3.E16@6968.5,4330.71 ; U7.17@7322.83,3039.37 v1(7421.26,3039.37)
  Mid-Layer 1, SIG1 w5.91: v1(6948.82,4311.02) 6929.13,4291.34 6929.13,3956.69 7263.78,3622.05 7421.26,3622.05 7464.57,3578.74 7464.57,3066.93 7437.01,3039.37 v1(7421.26,3039.37)
SD_NRAS: U3.C16 U7.18 | length 1693.5
  Top Layer, Top w5.91: v1(6948.82,4232.28) U3.C16@6968.5,4251.97 ; U7.18@7322.83,3007.87 v1(7421.26,3007.87)
  Mid-Layer 1, SIG1 w5.91: v1(6948.82,4232.28) 6948.82,3956.69 7263.78,3641.73 7421.26,3641.73 7476.38,3586.61 7476.38,3047.24 7437.01,3007.87 v1(7421.26,3007.87)
SOFTRESET_N: R20.1 S2.3 S2.4 U3.L15 | length 5135.7
  Top Layer, Top w5.91: S2.3@3700,2312.5 v1(3850,2312.5) S2.4@4000,2312.5 ; v1(6988.19,4547.24) U3.L15@7007.87,4566.93
  Mid-Layer 2, SIG3 w5.91: v1(3850,2312.5) 3897.64,2360.14 3897.64,3090.55 4271.65,3464.57 4271.65,3976.38 4862.2,4566.93 6968.5,4566.93 v1(6988.19,4547.24)
SS1: C9.2 U1.122 | length 46.3
  Top Layer, Top w5.91: U1.122@4775,2725 4775,2706.25 4781.25,2700 v1(4800,2700)
SS2: C8.2 U1.50 | length 79.1
  Top Layer, Top w5.91: U1.50@5075,2725 v1(5100,2700)
  Bottom Layer, Bottom w5.91: v1(5100,2700) C8.2@5143.75,2700
THERMAL_SW1: U1.86 U1.87 U1.88 U1.89 U1.90 | length 200
  Top Layer, Top w5.91: U1.86@4925,2725 U1.87@4925,2775 U1.88@4925,2825 U1.89@4925,2875 U1.90@4925,2925
THERMAL_SW2: U1.14 U1.15 U1.16 U1.17 U1.18 | length 200
  Top Layer, Top w5.91: U1.14@5225,2725 U1.15@5225,2775 U1.16@5225,2825 U1.17@5225,2875 U1.18@5225,2925
TX0+: J9.3 R35.1 U9.7 | length 926.5
  Top Layer, Top w5.91: v1(3877.95,5413.39) 3917.32,5413.39 3925.2,5421.26 3925.2,5472.44 3944.88,5492.13 U9.7@4094.49,5492.13
  Bottom Layer, Bottom w5.91: J9.3@3375,5550 3524.8,5550 3543.31,5531.5 3866.14,5531.5 3897.64,5500 3897.64,5417.32 3893.7,5413.39 v1(3877.95,5413.39)
TX0-: J9.6 R36.1 U9.6 | length 744
  Top Layer, Top w5.91: v1(3877.95,5484.25) 3917.32,5484.25 3944.88,5511.81 U9.6@4094.49,5511.81
  Bottom Layer, Bottom w5.91: J9.6@3475,5400 3510.24,5400 3523.62,5413.39 3523.62,5492.13 3543.31,5511.81 3866.14,5511.81 3877.95,5500 v1(3877.95,5484.25)
TX1+: J9.15 R44.1 U10.17 | length 938.1
  Top Layer, Top w5.91: v1(3877.95,4854.33) 3917.32,4854.33 3925.2,4862.2 3925.2,4901.57 3944.88,4921.26 U10.17@4114.17,4921.26
  Bottom Layer, Bottom w5.91: J9.15@3375,5000 3515.75,5000 3543.31,4972.44 3866.14,4972.44 3897.64,4940.94 3897.64,4858.27 3893.7,4854.33 v1(3877.95,4854.33)
TX1-: J9.18 R45.1 U10.16 | length 752.7
  Top Layer, Top w5.91: v1(3877.95,4925.2) 3917.32,4925.2 3933.07,4940.94 U10.16@4114.17,4940.94
  Bottom Layer, Bottom w5.91: J9.18@3475,4850 3515.35,4850 3523.62,4858.27 3523.62,4933.07 3543.31,4952.76 3866.14,4952.76 3877.95,4940.94 v1(3877.95,4925.2)
UART_RXD0: U3.P19 U12.15 | length 3538.2
  Top Layer, Top w5.91: U12.15@3826.77,3730.31 v1(3917.32,3730.32) ; v1(6830.71,4704.72) U3.P19@6850.39,4685.04
  Mid-Layer 1, SIG1 w5.91: v1(3917.32,3730.32) 3917.32,3877.95 4251.97,4212.6 4507.87,4212.6 5019.69,4724.41 6811.02,4724.41 v1(6830.71,4704.72)
UART_RXD1: U3.N19 U12.10 | length 3955.4
  Top Layer, Top w5.91: U12.10@3543.31,3627.95 3596.46,3627.95 3622.05,3602.36 v1(3897.64,3602.36) ; v1(6830.71,4665.35) U3.N19@6850.39,4645.67
  Mid-Layer 3, SIG2 w5.91: v1(3897.64,3602.36) 3937.01,3602.36 3976.38,3641.73 3976.38,3937.01 4015.75,3976.38 4251.97,3976.38 4960.63,4685.04 6811.02,4685.04 v1(6830.71,4665.35)
UART_TXD0: U3.P18 U12.13 | length 3651.8
  Top Layer, Top w5.91: U12.13@3826.77,3679.13 v1(3917.32,3679.13) ; v1(6870.08,4704.72) U3.P18@6889.76,4685.04
  Mid-Layer 3, SIG2 w5.91: v1(3917.32,3679.13) 3937.01,3679.13 3956.69,3698.82 3956.69,3937.01 4015.75,3996.06 4251.97,3996.06 4980.31,4724.41 6850.39,4724.41 v1(6870.08,4704.72)
UART_TXD1: U3.P17 U12.12 | length 3705.2
  Top Layer, Top w5.91: U12.12@3826.77,3653.54 v1(3897.64,3653.54) ; v1(6909.45,4704.72) U3.P17@6929.13,4685.04
  Mid-Layer 2, SIG3 w5.91: v1(3897.64,3653.54) 3937.01,3653.54 3956.69,3673.23 3956.69,3917.32 4015.75,3976.38 4192.91,3976.38 4940.94,4724.41 6889.76,4724.41 v1(6909.45,4704.72)
USB_5V: JP1.1 R51.1 U11.20 | length 2716.4
  Top Layer, Top w5.91: v1(3338.58,4035.43) U11.20@3338.58,4106.3 U11.20@3338.58,4118.11
  Mid-Layer 1, SIG1 w39.37: v1(3338.58,4035.43) 3338.58,4074.8 3358.27,4094.49 3543.31,4094.49 3562.99,4074.8 3562.99,3523.62 4686.61,2400 JP1.1@4900,2400
USB_5VR: C99.2 J10.1 R51.2 | length 488.3
  Top Layer, Top w5.91: J10.1@3024.61,4311.02 3129.92,4311.02 v1(3208.66,4232.28)
  Bottom Layer, Bottom w5.91: v1(3208.66,4232.28) C99.2@3338.58,4232.28 R51.2@3338.58,4090.55
USB_CLK: U3.AB13 U11.12 | length 4605.8
  Top Layer, Top w5.91: U11.12@3261.81,4397.64 3261.81,4358.27 3427.17,4192.91 v1(3602.36,4192.91) ; v1(7066.93,5177.17) 7086.61,5157.48 U3.AB13@7086.61,5000
  Bottom Layer, Bottom w5.91: v1(3602.36,4192.91) 4409.45,4192.91 5472.44,5255.91 7047.24,5255.91 7066.93,5236.22 v1(7066.93,5177.17)
USB_CTS_N: U3.R22 U11.11 | length 3756.6
  Top Layer, Top w5.91: U11.11@3287.4,4397.64 3287.4,4358.27 3433.07,4212.6 4527.56,4212.6 5039.37,4724.41 U3.R22@6732.28,4724.41
USB_D+: J10.3 U11.15 | length 280.5
  Top Layer, Top w5.91: J10.3@3024.61,4248.03 3129.92,4248.03 3210.63,4167.32 U11.15@3210.63,4106.3
USB_D-: J10.2 U11.16 | length 322.6
  Top Layer, Top w5.91: J10.2@3024.61,4279.53 3129.92,4279.53 3236.22,4173.23 U11.16@3236.22,4106.3
USB_DCD_N: U3.T19 U11.10 | length 3865.4
  Top Layer, Top w5.91: U11.10@3312.99,4397.64 3312.99,4358.27 3438.98,4232.28 v1(3602.36,4232.28) ; v1(6830.71,4783.46) U3.T19@6850.39,4763.78
  Mid-Layer 1, SIG1 w5.91: v1(3602.36,4232.28) 4507.87,4232.28 5059.06,4783.46 v1(6830.71,4783.46)
USB_DSR_N: U3.T22 U11.9 | length 3689.1
  Top Layer, Top w5.91: U11.9@3338.58,4397.64 3338.58,4358.27 3444.88,4251.97 4547.24,4251.97 5059.06,4763.78 U3.T22@6732.28,4763.78
USB_DTR_N: U3.U22 U11.2 | length 3461
  Top Layer, Top w5.91: U11.2@3517.72,4397.64 3517.72,4358.27 3545.28,4330.71 4586.61,4330.71 5059.06,4803.15 U3.U22@6732.28,4803.15
USB_JTAG_TCK: JP9.1 U11.14 | length 736
  Top Layer, Top w5.91: v1(3210.63,4311.02) U11.14@3210.63,4397.64
  Mid-Layer 1, SIG1 w5.91: v1(3210.63,4311.02) 3196.85,4311.02 3188.98,4303.15 3188.98,3783.46 3251.97,3720.47 v1(3267.72,3720.47)
USB_JTAG_TDI: JP11.1 U11.22 | length 290.4
  Top Layer, Top w5.91: v1(3389.76,4035.43) U11.22@3389.76,4106.3
  Mid-Layer 1, SIG1 w5.91: v1(3267.72,3877.95) 3287.4,3877.95 3389.76,3980.32 v1(3389.76,4035.43)
USB_JTAG_TDO: JP10.1 U11.23 | length 377.5
  Top Layer, Top w5.91: v1(3415.35,4015.75) U11.23@3415.35,4106.3
  Mid-Layer 1, SIG1 w5.91: v1(3267.72,3799.21) 3283.46,3799.21 3287.4,3803.15 3287.4,3858.27 3415.35,3986.22 v1(3415.35,4015.75)
USB_JTAG_TMS: JP8.1 U11.13 | length 856.7
  Top Layer, Top w5.91: v1(3236.22,4330.71) U11.13@3236.22,4397.64
  Mid-Layer 1, SIG1 w5.91: v1(3236.22,4330.71) 3196.85,4330.71 3169.29,4303.15 3169.29,3724.41 3251.97,3641.73 v1(3267.72,3641.73)
USB_RI_N: U3.T21 U11.6 | length 3651.7
  Top Layer, Top w5.91: U11.6@3415.35,4397.64 3415.35,4358.27 3501.97,4271.65 4547.24,4271.65 5059.06,4783.46 6751.97,4783.46 U3.T21@6771.65,4763.78
USB_RTS_N: U3.U20 U11.3 | length 3614.3
  Top Layer, Top w5.91: U11.3@3492.13,4397.64 3492.13,4358.27 3539.37,4311.02 v1(3602.36,4311.02) ; v1(6791.34,4822.83) U3.U20@6811.02,4803.15
  Mid-Layer 1, SIG1 w5.91: v1(3602.36,4311.02) 4547.24,4311.02 5078.74,4842.52 6771.65,4842.52 v1(6791.34,4822.83)
USB_RXD: U3.U19 U11.5 | length 3704.8
  Top Layer, Top w5.91: U11.5@3440.94,4397.64 3440.94,4358.27 3507.87,4291.34 v1(3622.05,4291.34) ; v1(6830.71,4822.83) U3.U19@6850.39,4803.15
  Mid-Layer 1, SIG1 w5.91: v1(3622.05,4291.34) 4547.24,4291.34 5059.06,4803.15 6811.02,4803.15 v1(6830.71,4822.83)
USB_TXD: U3.V20 U11.1 | length 3546.8
  Top Layer, Top w5.91: U11.1@3543.31,4397.64 3543.31,4358.27 3551.18,4350.39 v1(3602.36,4350.39) ; v1(6791.34,4862.2) U3.V20@6811.02,4842.52
  Mid-Layer 1, SIG1 w5.91: v1(3602.36,4350.39) 4566.93,4350.39 5098.43,4881.89 6771.65,4881.89 v1(6791.34,4862.2)
USER_DIL_0: SW1.8 U3.P20 | length 4507.8
  Top Layer, Top w5.91: SW1.8@3125,3325 4073.03,3325 4212.6,3464.57 4212.6,3877.95 5019.69,4685.04 6692.91,4685.04 6712.6,4704.72 6791.34,4704.72 U3.P20@6811.02,4685.04
USER_DIL_1: SW1.7 U3.P22 | length 4454.2
  Top Layer, Top w5.91: SW1.7@3125,3225 3992.72,3225 4232.28,3464.57 4232.28,3877.95 5019.69,4665.35 6692.91,4665.35 6712.6,4685.04 U3.P22@6732.28,4685.04
USER_DIL_2: SW1.6 U3.N16 | length 4805.8
  Top Layer, Top w5.91: v1(6948.82,4665.35) U3.N16@6968.5,4645.67
  Mid-Layer 2, SIG3 w5.91: v1(3125,3125) 3873.03,3125 4212.6,3464.57 4212.6,3976.38 4921.26,4685.04 6929.13,4685.04 v1(6948.82,4665.35)
USER_DIL_3: SW1.5 U3.M19 | length 4712.8
  Top Layer, Top w5.91: v1(6830.71,4625.98) U3.M19@6850.39,4606.3
  Mid-Layer 2, SIG3 w5.91: v1(3125,3025) 3792.72,3025 4232.28,3464.57 4232.28,3976.38 4901.57,4645.67 6811.02,4645.67 v1(6830.71,4625.98)
USER_LED_0: R16.1 U3.M17 | length 4588.5
  Top Layer, Top w5.91: v1(6909.45,4625.98) U3.M17@6929.13,4606.3
  Mid-Layer 3, SIG2 w5.91: v1(3433.07,2759.84) 3606.3,2759.84 4232.28,3385.83 4232.28,3917.32 4921.26,4606.3 6889.76,4606.3 v1(6909.45,4625.98)
USER_LED_1: R17.1 U3.M18 | length 4536.1
  Top Layer, Top w5.91: v1(6870.08,4625.98) U3.M18@6889.76,4606.3
  Mid-Layer 3, SIG2 w5.91: v1(3433.07,2830.71) 3657.48,2830.71 4212.6,3385.83 4212.6,3917.32 4940.94,4645.67 6850.39,4645.67 v1(6870.08,4625.98)
USER_LED_2: R18.1 U3.M16 | length 4645.7
  Top Layer, Top w5.91: v1(6948.82,4625.98) U3.M16@6968.5,4606.3
  Mid-Layer 2, SIG3 w5.91: v1(3433.07,2688.98) 3476.38,2688.98 4251.97,3464.57 4251.97,3976.38 4881.89,4606.3 6929.13,4606.3 v1(6948.82,4625.98)
USER_LED_3: R19.1 U3.L17 | length 4630.9
  Top Layer, Top w5.91: v1(6909.45,4547.24) U3.L17@6929.13,4566.93
  Mid-Layer 3, SIG2 w5.91: v1(3433.07,2618.11) 3484.25,2618.11 4251.97,3385.83 4251.97,3917.32 4901.57,4566.93 6889.76,4566.93 v1(6909.45,4547.24)
V_BANK3: C17.2 C18.2 C19.2 C20.2 C21.2 C22.2 JP7.2 U3.C2 U3.F4 U3.F6 U3.G2 U3.J5 U3.L2 U3.L7 U3.N5 U3.R2 U3.U5 U3.W2 | length 1829.5
  Top Layer, Top w5.91: U3.L7@7322.83,4566.93 v1(7342.52,4547.24) ; U3.F6@7362.2,4370.08 v1(7381.89,4350.39) ; U3.J5@7401.57,4488.19 v1(7421.26,4468.5) ; U3.N5@7401.57,4645.67 v1(7421.26,4665.35) ; U3.U5@7401.57,4803.15 v1(7421.26,4822.83) ; U3.F4@7440.94,4370.08 v1(7460.63,4350.39) ; v1(7500,4547.24) U3.L2@7519.69,4566.93 ; U3.C2@7519.69,4251.97 v1(7539.37,4232.28) ; U3.G2@7519.69,4409.45 v1(7539.37,4389.76) ; U3.R2@7519.69,4724.41 v1(7539.37,4744.09) ; U3.W2@7519.69,4881.89 v1(7539.37,4901.57)
  Top Layer, Top w39.37: v1(7696.85,3976.38) v1(7696.85,4035.43)
  Bottom Layer, Bottom w5.91: v1(7342.52,4547.24) 7362.2,4527.56 7440.94,4527.56 ; v1(7381.89,4350.39) 7401.57,4330.71 7460.63,4330.71 ; v1(7421.26,4468.5) 7440.94,4488.19 7440.94,4527.56 ; v1(7421.26,4665.35) 7440.94,4685.04 7559.06,4685.04 ; v1(7421.26,4822.83) 7440.94,4842.52 7559.06,4842.52 ; v1(7460.63,4350.39) 7460.63,4330.71 ; v1(7500,4547.24) 7500,4527.56 ; v1(7539.37,4232.28) 7559.06,4251.97 7559.06,4330.71 ; v1(7539.37,4389.76) 7559.06,4370.08 7559.06,4330.71 ; v1(7539.37,4744.09) 7559.06,4724.41 7559.06,4685.04 ; v1(7539.37,4901.57) 7559.06,4881.89 7559.06,4842.52 ; v1(7637.8,4311.02) 7598.43,4311.02 7578.74,4330.71 7559.06,4330.71 ; v1(7637.8,4507.87) 7598.43,4507.87 7578.74,4527.56 7500,4527.56 ; v1(7637.8,4704.72) 7598.43,4704.72 7578.74,4685.04 7559.06,4685.04 ; v1(7637.8,4862.2) 7598.43,4862.2 7578.74,4842.52 7559.06,4842.52 ; 7440.94,4527.56 7500,4527.56 ; 7460.63,4330.71 7559.06,4330.71
  other v1: 7637.8,4153.54 7637.8,4232.28
VME_5V: J8.32a J8.32b J8.32c JP1.3 | length 3870.6
  Mid-Layer 1, SIG1 w39.37: JP1.3@5100,2400 5257.48,2400 5413.39,2244.09 8267.72,2244.09 8523.62,2500 J8.32c@8600,2500 J8.32b@8700,2500 J8.32a@8800,2500
VME_5V_STANDBY: J8.31b
VME_+12V: J8.31c
VME_-12V: J8.31a
VME_A01: J7.24 J8.30a U3.B3 | length 2412.4
  Top Layer, Top w5.91: U3.B3@7480.31,4212.6 7500,4192.91 7500,4153.54 7519.69,4133.86 7519.69,3956.69 7795.28,3681.1 7834.65,3681.1 7972.44,3543.31 7972.44,3051.18 8188.98,2834.65 8299.21,2834.65 8307.09,2842.52 J7.24@8307.09,2874.02
  Bottom Layer, Bottom w5.91: J7.24@8307.09,2874.02 8346.46,2874.02 8470.47,2750 8750,2750 J8.30a@8800,2700
VME_A02: J7.23 J8.29a U3.A2 | length 2273.8
  Top Layer, Top w5.91: U3.A2@7519.69,4173.23 7519.69,4153.54 7539.37,4133.86 7539.37,3956.69 7795.28,3700.79 7834.65,3700.79 7992.13,3543.31 7992.13,3070.87 8188.98,2874.02 J7.23@8228.35,2874.02
  Bottom Layer, Bottom w5.91: J7.23@8228.35,2874.02 8267.72,2913.39 8346.46,2913.39 8409.84,2850 8750,2850 J8.29a@8800,2800
VME_A03: J7.22 J8.28a U3.B1 | length 2310.5
  Top Layer, Top w5.91: U3.B1@7559.06,4212.6 7834.65,4212.6 8031.5,4015.75 8031.5,3149.61 8188.98,2992.13 8299.21,2992.13 8307.09,2984.25 J7.22@8307.09,2952.76
  Bottom Layer, Bottom w5.91: J7.22@8307.09,2952.76 8346.46,2952.76 8349.21,2950 8750,2950 J8.28a@8800,2900
VME_A04: J7.21 J8.27a U3.B2 | length 2382.1
  Top Layer, Top w5.91: U3.B2@7519.69,4212.6 7539.37,4192.91 7834.65,4192.91 8011.81,4015.75 8011.81,3129.92 8188.98,2952.76 J7.21@8228.35,2952.76
  Bottom Layer, Bottom w5.91: J7.21@8228.35,2952.76 8267.72,2992.13 8346.46,2992.13 8404.33,3050 8750,3050 J8.27a@8800,3000
VME_A05: J7.20 J8.26a U3.C1 | length 2319
  Top Layer, Top w5.91: U3.C1@7559.06,4251.97 7834.65,4251.97 8051.18,4035.43 8051.18,3208.66 8188.98,3070.87 8299.21,3070.87 8307.09,3062.99 J7.20@8307.09,3031.5
  Bottom Layer, Bottom w5.91: J7.20@8307.09,3031.5 8346.46,3031.5 8464.96,3150 8750,3150 J8.26a@8800,3100
VME_A06: J7.19 J8.25a U3.C3 | length 2420.8
  Top Layer, Top w5.91: U3.C3@7480.31,4251.97 v1(7500,4232.28)
  Mid-Layer 1, SIG1 w5.91: v1(7500,4232.28) 7519.69,4212.6 7834.65,4212.6 8051.18,3996.06 8051.18,3169.29 8188.98,3031.5 J7.19@8228.35,3031.5
  Bottom Layer, Bottom w5.91: J7.19@8228.35,3031.5 8267.72,3070.87 8346.46,3070.87 8525.59,3250 8750,3250 J8.25a@8800,3200
VME_A07: J7.18 J8.24a U3.F7 | length 2612.6
  Top Layer, Top w5.91: U3.F7@7322.83,4370.08 v1(7342.52,4350.39) ; v1(7775.59,4311.02) 7795.28,4291.34 7834.65,4291.34 8090.55,4035.43 8090.55,3248.03 8188.98,3149.61 8299.21,3149.61 8307.09,3141.73 J7.18@8307.09,3110.24
  Mid-Layer 4, SIG4 w5.91: v1(7342.52,4350.39) 7362.2,4330.71 7755.91,4330.71 v1(7775.59,4311.02)
  Bottom Layer, Bottom w5.91: J7.18@8307.09,3110.24 8346.46,3110.24 8543.31,3307.09 8543.31,3330.81 8562.5,3350 8750,3350 J8.24a@8800,3300
VME_A08: J7.17 J8.30c U3.D2 | length 2381.7
  Top Layer, Top w5.91: U3.D2@7519.69,4291.34 7539.37,4271.65 7834.65,4271.65 8070.87,4035.43 8070.87,3228.35 8188.98,3110.24 J7.17@8228.35,3110.24
  Mid-Layer 4, SIG4 w5.91: J7.17@8228.35,3110.24 8267.72,3149.61 8346.46,3149.61 8484.25,3011.81 8484.25,2778.25 8562.5,2700 J8.30c@8600,2700
VME_A09: J7.16 J8.29c U3.C4 | length 2348.9
  Top Layer, Top w5.91: U3.C4@7440.94,4251.97 v1(7460.63,4232.28)
  Mid-Layer 1, SIG1 w5.91: v1(7460.63,4232.28) 7480.31,4251.97 7834.65,4251.97 8070.87,4015.75 8070.87,3267.72 8188.98,3149.61 8267.72,3149.61 J7.16@8307.09,3188.98
  Mid-Layer 4, SIG4 w5.91: J7.16@8307.09,3188.98 8346.46,3188.98 8503.94,3031.5 8503.94,2858.56 8562.5,2800 J8.29c@8600,2800
VME_A10: J7.15 J8.28c U3.D3 | length 2221.1
  Top Layer, Top w5.91: U3.D3@7480.31,4291.34 v1(7500,4271.65)
  Mid-Layer 1, SIG1 w5.91: v1(7500,4271.65) 7834.65,4271.65 8090.55,4015.75 8090.55,3287.4 8188.98,3188.98 J7.15@8228.35,3188.98
  Mid-Layer 4, SIG4 w5.91: J7.15@8228.35,3188.98 8267.72,3228.35 8346.46,3228.35 8523.62,3051.18 8523.62,2938.88 8562.5,2900 J8.28c@8600,2900